# EAGLE board lcd_duffle_pth_mk_2 (EAGLE 6.5.0)
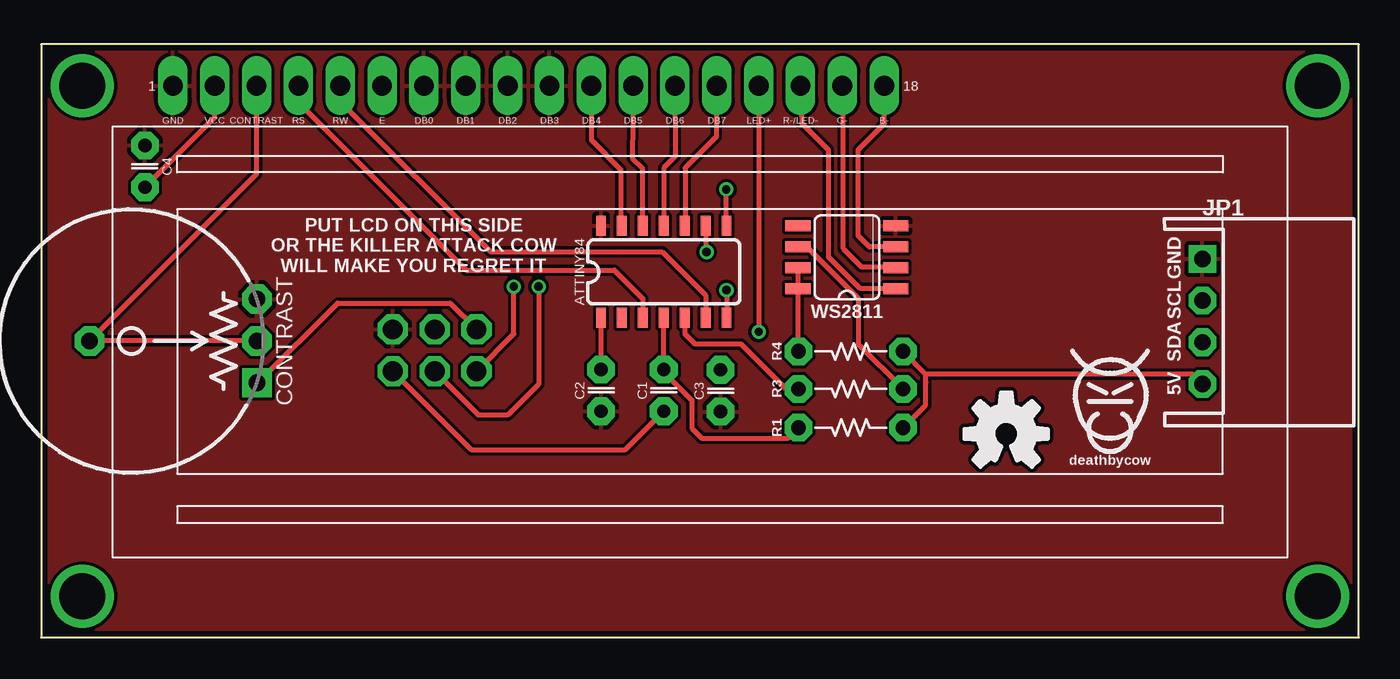
[diagram p0: board, top side]
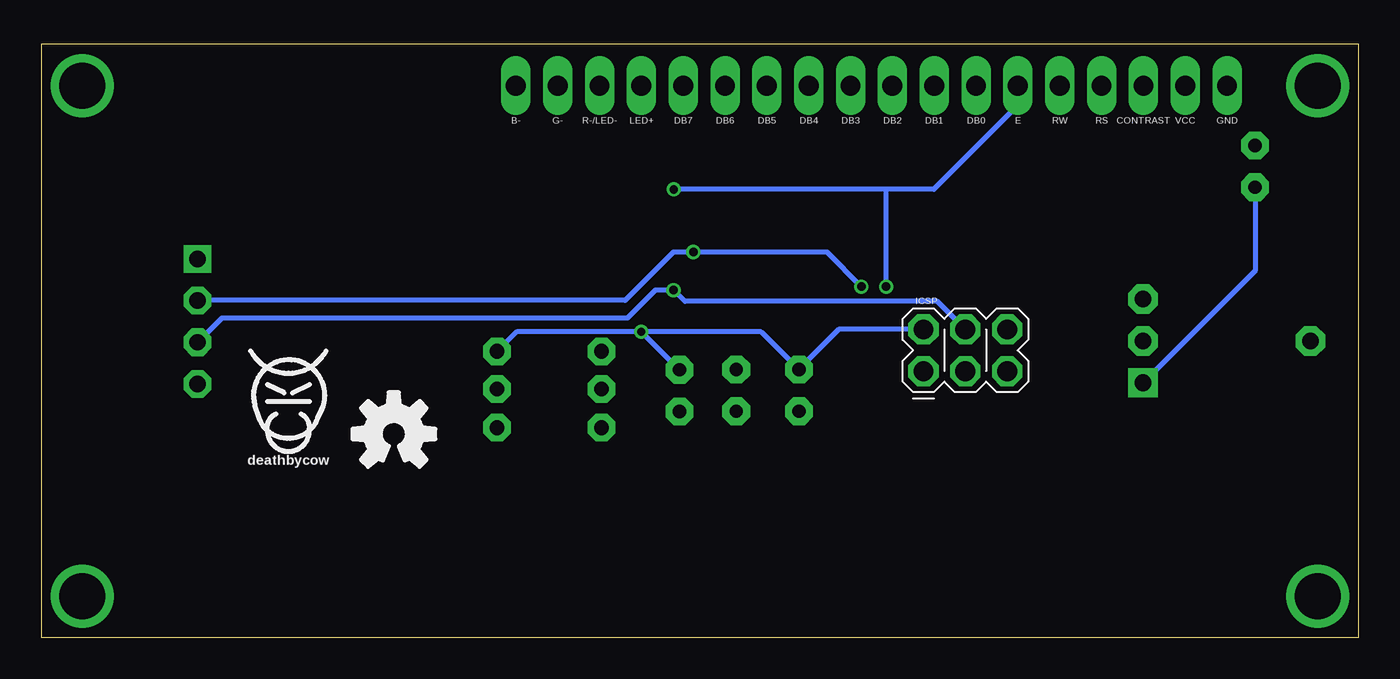
[diagram p1: board, bottom side, seen from below]

Size 80 x 36 mm. Coordinates in mm from the lower left corner, seen from the top.
Outline: 80,0 0,0 0,36 80,36 80,0
Copper layers (1*16): Top 0.0356mm / dielectric 1.5011mm / Bottom 0.0356mm
Design rules "LaenPCBOrder_2": minimum track width 6mil, minimum drill 13mil, track to track 6mil, track to pad 6mil, pad to pad 6mil, via to via 6mil, smd to smd 6mil, copper to edge 15mil, drill to drill 6mil, minimum pad ring 7mil, minimum via ring 7mil, stop-mask expansion 3mil, vias tented up to drill 20mil, thermal gap 10mil

## Footprints (pad centres in the part's own frame; a part is rotated, then mirrored left to right if it is on the bottom)
SO14 = smd 0.6 x 1.2: 1 -3.81,-2.8; 2 -2.54,-2.8; 3 -1.27,-2.8; 4 0,-2.8; 5 1.27,-2.8; 6 2.54,-2.8; 7 3.81,-2.8; 8 3.81,2.8; 9 2.54,2.8; 10 1.27,2.8; 11 0,2.8; 12 -1.27,2.8; 13 -2.54,2.8; 14 -3.81,2.8
C025-024X044 = drill 0.813 pad 1.676 octagon: 1 -1.27,0; 2 1.27,0
POT-THUMBWHEEL = drill 1.016 pad 1.778 square: 1 -2.54,0 | drill 1.016 pad 1.778 octagon: 2 0,0; 2@1 0,10.16; 3 2.54,0
2X3_POGO = drill 1.2 pad 1.829 octagon: P$1 0,0; P$2 0,2.54; P$3 2.54,0; P$4 2.54,2.54; P$5 5.08,0; P$6 5.08,2.54
1X04-2.5MM_JST_XH_RA = drill 1 pad 1.676 square: 1 0.02,0 | drill 1 pad 1.676 octagon: 2 2.54,0; 3 5.08,0; 4 7.62,0
RESISTOR-AXIAL-PTH-5.08MM = drill 0.9 pad 1.676 octagon: P$1 -3.175,0; P$2 3.175,0
LCD1602-RGB-CENTERED = drill 1.2 pad 1.778 long: 1 -32,15.5; 2 -29.46,15.5; 3 -26.92,15.5; 4 -24.38,15.5; 5 -21.84,15.5; 6 -19.3,15.5; 7 -16.76,15.5; 8 -14.22,15.5; 9 -11.68,15.5; 10 -9.14,15.5; 11 -6.6,15.5; 12 -4.06,15.5; 13 -1.52,15.5; 14 1.02,15.5; 15 3.56,15.5; 16 6.1,15.5; 17 8.64,15.5; 18 11.18,15.5 | drill 2.8 pad 3.81: HOLE1 -37.5,15.5; HOLE2 37.5,15.5; HOLE3 -37.5,-15.5; HOLE4 37.5,-15.5
SO08-SKINNYPADS = smd 0.66 x 1.524: 1 -1.905,-2.973; 2 -0.635,-2.973; 3 0.635,-2.973; 4 1.905,-2.973; 5 1.905,2.973; 6 0.635,2.973; 7 -0.635,2.973; 8 -1.905,2.973

## Placement (x,y rotation side)
ATTINY84  ATTINY84  [SO14]  37.8,22.2 0 top
C1  0.1uF  [C025-024X044]  37.8,15 90 top
C2  0.1uF  [C025-024X044]  34,15 90 top
C3  0.1uF  [C025-024X044]  41.25,14.98 90 top
C4  0.1uF  [C025-024X044]  6.3,28.6 270 top
CONTRAST  [POT-THUMBWHEEL]  13.1,18 90 top
ICSP  [2X3_POGO]  26.43,16.16 0 bottom
JP1  I2C  [1X04-2.5MM_JST_XH_RA]  70.5,23 270 top
R1  10k  [RESISTOR-AXIAL-PTH-5.08MM]  49.15,12.74 0 top
R3  33R  [RESISTOR-AXIAL-PTH-5.08MM]  49.15,15.09 180 top
R4  100R  [RESISTOR-AXIAL-PTH-5.08MM]  49.15,17.37 0 top
U$1  HD44780LCD_RGBLONGPINS  [LCD1602-RGB-CENTERED]  40,18 0 top
U$2  [COW_SMALL]  64.99,14.84 0 bottom
U$3  [COW_SMALL]  64.89,14.84 0 top
U$5  [OSHWLOGO_TOP_0.2_A]  58.59,12.35 0 bottom
U$7  [OSHWLOGO_BOT_0.2_A]  58.59,12.35 0 bottom
WS2811  WS2811-SOP8  [SO08-SKINNYPADS]  48.92,23.08 90 top

## Library data of the parts
ATTINY84 = SparkFun-DigitalIC
C1-C4 CONTRAST JP1 R1 R3 R4 U$1 = A_butts
ICSP = SparkFun-Connectors; PROD_ID: HW-11044
U$2 U$3 U$5 U$7 = butts
WS2811 = adafruit

## Nets
5V: ATTINY84.1 C2.2 C3.2 C4.2 CONTRAST.1 ICSP.P$2 JP1.4 R1.P$2 R4.P$2 U$1.2 U$1.15
B: U$1.18 WS2811.3
CONTRAST: CONTRAST.2 CONTRAST.2@1 U$1.3
DB4: ATTINY84.13 U$1.11
DB5: ATTINY84.12 U$1.12
DB6: ATTINY84.11 U$1.13
DB7: ATTINY84.10 U$1.14
E: ATTINY84.8 ICSP.P$1 U$1.6
G: U$1.17 WS2811.2
GND: ATTINY84.14 C2.1 C3.1 C4.1 CONTRAST.3 ICSP.P$6 JP1.1 U$1.1 U$1.7 U$1.8 U$1.9 U$1.10 WS2811.4
LED_CNTL: ATTINY84.5 R3.P$2
N$1: R3.P$1 WS2811.6
N$2: R4.P$1 WS2811.7 WS2811.8
N$3: C1.1 ICSP.P$5
R: U$1.16 WS2811.1
RS: ATTINY84.3 U$1.4
RST: ATTINY84.4 C1.2 R1.P$1
RW: ATTINY84.6 U$1.5
SCL: ATTINY84.9 ICSP.P$3 JP1.2
SDA: ATTINY84.7 ICSP.P$4 JP1.3

## Tracks (layer width: path | path; a pad name or v marks a point on that pad's centre or on a via)
5V  (via drill 0.5)
  Top 0.305: U$1.15 v43.56,18.56 | C2.2 ATTINY84.1 | C4.2 10.54,31.57 U$1.2 | 53.7,15.5 53.7,14.1 52.34,12.74 R1.P$2 | 53.7,15.5 53.7,15.99 | 53.7,15.99 R4.P$2 | 53.72,15.48 53.7,15.5 | CONTRAST.1 13.16,15.46 18,20.3 24.83,20.3 ICSP.P$2 | JP1.4 69.89,15.99 53.7,15.99
  Bottom 0.305: C4.2 6.3,22.26 CONTRAST.1 | v43.56,18.56 51.13,18.56 R4.P$2 | v43.56,18.56 36.29,18.56 C2.2 31.57,18.7 ICSP.P$2 | C3.2 v43.56,18.56
B
  Top 0.305: WS2811.3 50.29,23.71 49.6,24.4 49.6,29.6 51.2,31.2 51.2,33.59 U$1.18
CONTRAST
  Top 0.305: U$1.3 13.08,28.14 CONTRAST.2@1 CONTRAST.2
DB4
  Top 0.305: U$1.11 33.4,30.2 35.2,28.4 35.2,25.06 ATTINY84.13
DB5
  Top 0.305: U$1.12 35.9,29.1 36.5,28.5 36.5,25.03 ATTINY84.12
DB6
  Top 0.305: U$1.13 38.5,29.2 37.8,28.5 ATTINY84.11
DB7
  Top 0.305: U$1.14 41,30.4 39.1,28.5 39.1,25.03 ATTINY84.10
E  (via drill 0.5)
  Top 0.305: ATTINY84.8 v41.6,27.2 | ICSP.P$1 28.7,18.43 v28.7,21.3
  Bottom 0.305: 28.7,27.2 25.8,27.2 20.7,32.3 U$1.6 | 28.7,27.2 v41.6,27.2 | v28.7,21.3 28.7,27.2
G
  Top 0.305: U$1.17 48.7,33.63 48.7,23.6 49.8,22.5 51.84,22.5 WS2811.2
GND
  pour Top (isolate 0.2): 80.2,0.1 80,36 0,36 0.06,0.1
LED_CNTL
  Top 0.305: R3.P$2 45.21,15.09 42.5,17.8 39.7,17.8 39.1,18.4 39.1,19.37 ATTINY84.5
N$1
  Top 0.305: R3.P$1 49.6,17.81 49.6,20.6 46.49,23.71 WS2811.6
N$2
  Top 0.305: WS2811.7 WS2811.8 45.98,21.15 R4.P$1
N$3
  Top 0.305: ICSP.P$5 26.11,11.4 35.47,11.4 C1.1
R
  Top 0.305: U$1.16 46.17,31.23 47.8,29.6 47.8,23.1 49.7,21.2 51.87,21.2 WS2811.1
RS
  Top 0.305: ATTINY84.3 36.53,20.57 34.8,22.3 25.8,22.3 15.6,32.5 15.6,33.48 U$1.4
RST
  Top 0.305: ATTINY84.4 C1.2 37.8,16.1 39.5,14.4 39.5,12.7 40.1,12.1 45.34,12.1 R1.P$1
RW
  Top 0.305: ATTINY84.6 40.34,20.76 37.7,23.4 27.3,23.4 18.2,32.5 18.2,33.46 U$1.5
SCL  (via drill 0.5)
  Top 0.305: ICSP.P$3 26.55,13.5 28.33,13.5 30.2,15.37 v30.2,21.3 | ATTINY84.9 40.34,23.46 v40.4,23.4
  Bottom 0.305: v30.2,21.3 32.3,23.4 v40.4,23.4 41.6,23.4 44.54,20.46 JP1.2
SDA  (via drill 0.5)
  Top 0.305: v41.61,21.09 ATTINY84.7
  Bottom 0.305: JP1.3 69.02,19.4 44.4,19.4 42.7,21.1 v41.6,21.1 v41.61,21.09 40.92,20.4 25.59,20.4 ICSP.P$4

## Text on the board
tPlace: PUT LCD ON THIS SIDE / OR THE KILLER ATTACK COW / WILL MAKE YOU REGRET IT | GND | SCL | SDA | 5V